# EAGLE board BeagleBone-Breakout-layout-eagle (EAGLE 5.11)

Size 100 x 80 mm. Coordinates in mm from the lower left corner, seen from the top.
Outline: 0,0 100,0 100,80 0,80 0,0
Copper layers (1*16): Top 0.035mm / dielectric 1.5mm / Bottom 0.035mm
Design rules "default": minimum track width 10mil, minimum drill 24mil, track to track 8mil, track to pad 8mil, pad to pad 8mil, via to via 8mil, smd to smd 8mil, copper to edge 40mil, drill to drill 8mil, minimum pad ring 10mil, minimum via ring 8mil, stop-mask expansion 4mil, vias tented up to drill 0mil, thermal gap 10mil

## Footprints (pad centres in the part's own frame; a part is rotated, then mirrored left to right if it is on the bottom)
CONN23-2F = drill 0.8 square: 1 -1.27,27.94; 2 1.27,27.94; 3 -1.27,25.4; 4 1.27,25.4; 5 -1.27,22.86; 6 1.27,22.86; 7 -1.27,20.32; 8 1.27,20.32; 9 -1.27,17.78; 10 1.27,17.78; 11 -1.27,15.24; 12 1.27,15.24; 13 -1.27,12.7; 14 1.27,12.7; 15 -1.27,10.16; 16 1.27,10.16; 17 -1.27,7.62; 18 1.27,7.62; 19 -1.27,5.08; 20 1.27,5.08; 21 -1.27,2.54; 22 1.27,2.54; 23 -1.27,0; 24 1.27,0; 25 -1.27,-2.54; 26 1.27,-2.54; 27 -1.27,-5.08; 28 1.27,-5.08; 29 -1.27,-7.62; 30 1.27,-7.62; 31 -1.27,-10.16; 32 1.27,-10.16; 33 -1.27,-12.7; 34 1.27,-12.7; 35 -1.27,-15.24; 36 1.27,-15.24; 37 -1.27,-17.78; 38 1.27,-17.78; 39 -1.27,-20.32; 40 1.27,-20.32; 41 -1.27,-22.86; 42 1.27,-22.86; 43 -1.27,-25.4; 44 1.27,-25.4; 45 -1.27,-27.94; 46 1.27,-27.94

## Placement (x,y rotation side)
P1  CONN23-2F  [CONN23-2F]  12.7,40.64 0 top
P2  CONN23-2FB  [CONN23-2F]  26.67,40.64 0 top
P3  CONN23-2F  [CONN23-2F]  69.85,40.64 0 top
P4  CONN23-2FB  [CONN23-2F]  90.17,40.64 0 top

## Library data of the parts
P1-P4 = conn23-2f

## Nets
AGND: P2.34 P4.34
AIN0: P2.39 P4.39
AIN1: P2.40 P4.40
AIN2: P2.37 P4.37
AIN3: P2.38 P4.38
AIN4: P2.33 P4.33
AIN5: P2.36 P4.36
AIN6: P2.35 P4.35
CLKOUT2: P2.41 P4.41
DGND: P1.1 P1.2 P2.1 P2.2 P2.43 P2.44 P2.45 P2.46 P3.1 P3.2 P4.1 P4.2 P4.43 P4.44 P4.45 P4.46
EHRPWM1A: P2.14 P4.14
EHRPWM1B: P2.16 P4.16
EHRPWM2A: P1.19 P3.19
EHRPWM2B: P1.13 P3.13
GPIO0_7: P2.42 P4.42
GPIO1_0: P1.25 P3.25
GPIO1_1: P1.24 P3.24
GPIO1_2: P1.5 P3.5
GPIO1_3: P1.6 P3.6
GPIO1_4: P1.23 P3.23
GPIO1_5: P1.22 P3.22
GPIO1_6: P1.3 P3.3
GPIO1_7: P1.4 P3.4
GPIO1_12: P1.12 P3.12
GPIO1_13: P1.11 P3.11
GPIO1_14: P1.16 P3.16
GPIO1_15: P1.15 P3.15
GPIO1_26: P1.14 P3.14
GPIO1_27: P1.17 P3.17
GPIO1_28: P2.12 P4.12
GPIO1_29: P1.26 P3.26
GPIO1_30: P1.21 P3.21
GPIO1_31: P1.20 P3.20
GPIO2_1: P1.18 P3.18
GPIO2_6: P1.45 P3.45
GPIO2_7: P1.46 P3.46
GPIO2_8: P1.43 P3.43
GPIO2_9: P1.44 P3.44
GPIO2_10: P1.41 P3.41
GPIO2_11: P1.42 P3.42
GPIO2_13: P1.40 P3.40
GPIO2_22: P1.27 P3.27
GPIO2_23: P1.29 P3.29
GPIO2_24: P1.28 P3.28
GPIO2_25: P1.30 P3.30
GPIO3_19: P2.27 P4.27
GPIO3_21: P2.25 P4.25
GPIO_12: P1.39 P3.39
I2C1_SCL: P2.17 P4.17
I2C1_SDA: P2.18 P4.18
I2C2_SCL: P2.19 P4.19
I2C2_SDA: P2.20 P4.20
PWR_BUT: P2.9 P4.9
SPI1_CS0: P2.28 P4.28
SPI1_D0: P2.29 P4.29
SPI1_D1: P2.30 P4.30
SPI1_SCLK: P2.31 P4.31
SYS_5V: P2.7 P2.8 P4.7 P4.8
SYS_RESETN: P2.10 P4.10
TIMER4: P1.7 P3.7
TIMER5: P1.9 P3.9
TIMER6: P1.10 P3.10
TIMER7: P1.8 P3.8
UART1_RXD: P2.26 P4.26
UART1_TXD: P2.24 P4.24
UART2_RXD: P2.22 P4.22
UART2_TXD: P2.21 P4.21
UART3_CTSN: P1.36 P3.36
UART3_RTSN: P1.34 P3.34
UART3_RXD: P2.15 P4.15
UART3_TXD: P2.23 P4.23
UART4_CTSN: P1.35 P3.35
UART4_RTSN: P1.33 P3.33
UART4_RXD: P2.11 P4.11
UART4_TXD: P2.13 P4.13
UART5_CTSN: P1.31 P3.31
UART5_RTSN: P1.32 P3.32
UART5_RXD: P1.38 P3.38
UART5_TXD: P1.37 P3.37
VDD_3V3EXP: P2.3 P2.4 P4.3 P4.4
VDD_5V: P2.5 P2.6 P4.5 P4.6
VDD_ADC: P2.32 P4.32

## Tracks (layer width: path | path; a pad name or v marks a point on that pad's centre or on a via)
AGND  (1 unrouted)
AIN0  (1 unrouted)
AIN1  (1 unrouted)
AIN2  (1 unrouted)
AIN3  (1 unrouted)
AIN4  (1 unrouted)
AIN5  (1 unrouted)
AIN6  (1 unrouted)
CLKOUT2  (1 unrouted)
DGND  (15 unrouted)
EHRPWM1A  (1 unrouted)
EHRPWM1B  (1 unrouted)
EHRPWM2A  (1 unrouted)
EHRPWM2B  (1 unrouted)
GPIO0_7  (1 unrouted)
GPIO1_0  (1 unrouted)
GPIO1_1  (1 unrouted)
GPIO1_2  (1 unrouted)
GPIO1_3  (1 unrouted)
GPIO1_4  (1 unrouted)
GPIO1_5  (1 unrouted)
GPIO1_6  (1 unrouted)
GPIO1_7  (1 unrouted)
GPIO1_12  (1 unrouted)
GPIO1_13  (1 unrouted)
GPIO1_14  (1 unrouted)
GPIO1_15  (1 unrouted)
GPIO1_26  (1 unrouted)
GPIO1_27  (1 unrouted)
GPIO1_28  (1 unrouted)
GPIO1_29  (1 unrouted)
GPIO1_30  (1 unrouted)
GPIO1_31  (1 unrouted)
GPIO2_1  (1 unrouted)
GPIO2_6  (1 unrouted)
GPIO2_7  (1 unrouted)
GPIO2_8  (1 unrouted)
GPIO2_9  (1 unrouted)
GPIO2_10  (1 unrouted)
GPIO2_11  (1 unrouted)
GPIO2_13  (1 unrouted)
GPIO2_22  (1 unrouted)
GPIO2_23  (1 unrouted)
GPIO2_24  (1 unrouted)
GPIO2_25  (1 unrouted)
GPIO3_19  (1 unrouted)
GPIO3_21  (1 unrouted)
GPIO_12  (1 unrouted)
I2C1_SCL  (1 unrouted)
I2C1_SDA  (1 unrouted)
I2C2_SCL  (1 unrouted)
I2C2_SDA  (1 unrouted)
PWR_BUT  (1 unrouted)
SPI1_CS0  (1 unrouted)
SPI1_D0  (1 unrouted)
SPI1_D1  (1 unrouted)
SPI1_SCLK  (1 unrouted)
SYS_5V  (3 unrouted)
SYS_RESETN  (1 unrouted)
TIMER4  (1 unrouted)
TIMER5  (1 unrouted)
TIMER6  (1 unrouted)
TIMER7  (1 unrouted)
UART1_RXD  (1 unrouted)
UART1_TXD  (1 unrouted)
UART2_RXD  (1 unrouted)
UART2_TXD  (1 unrouted)
UART3_CTSN  (1 unrouted)
UART3_RTSN  (1 unrouted)
UART3_RXD  (1 unrouted)
UART3_TXD  (1 unrouted)
UART4_CTSN  (1 unrouted)
UART4_RTSN  (1 unrouted)
UART4_RXD  (1 unrouted)
UART4_TXD  (1 unrouted)
UART5_CTSN  (1 unrouted)
UART5_RTSN  (1 unrouted)
UART5_RXD  (1 unrouted)
UART5_TXD  (1 unrouted)
VDD_3V3EXP  (3 unrouted)
VDD_5V  (3 unrouted)
VDD_ADC  (1 unrouted)